# Altium PCB GBxProg.PcbDoc
Units mil, origin at the board's own origin, x right, y up, seen from the top; angles counter-clockwise.
Board outline 1861 x 1950 mil, 2 copper layers (Top, Bottom), stack 65.748 mil thick; 34 components, 74 nets, 230 pads, 115 vias.
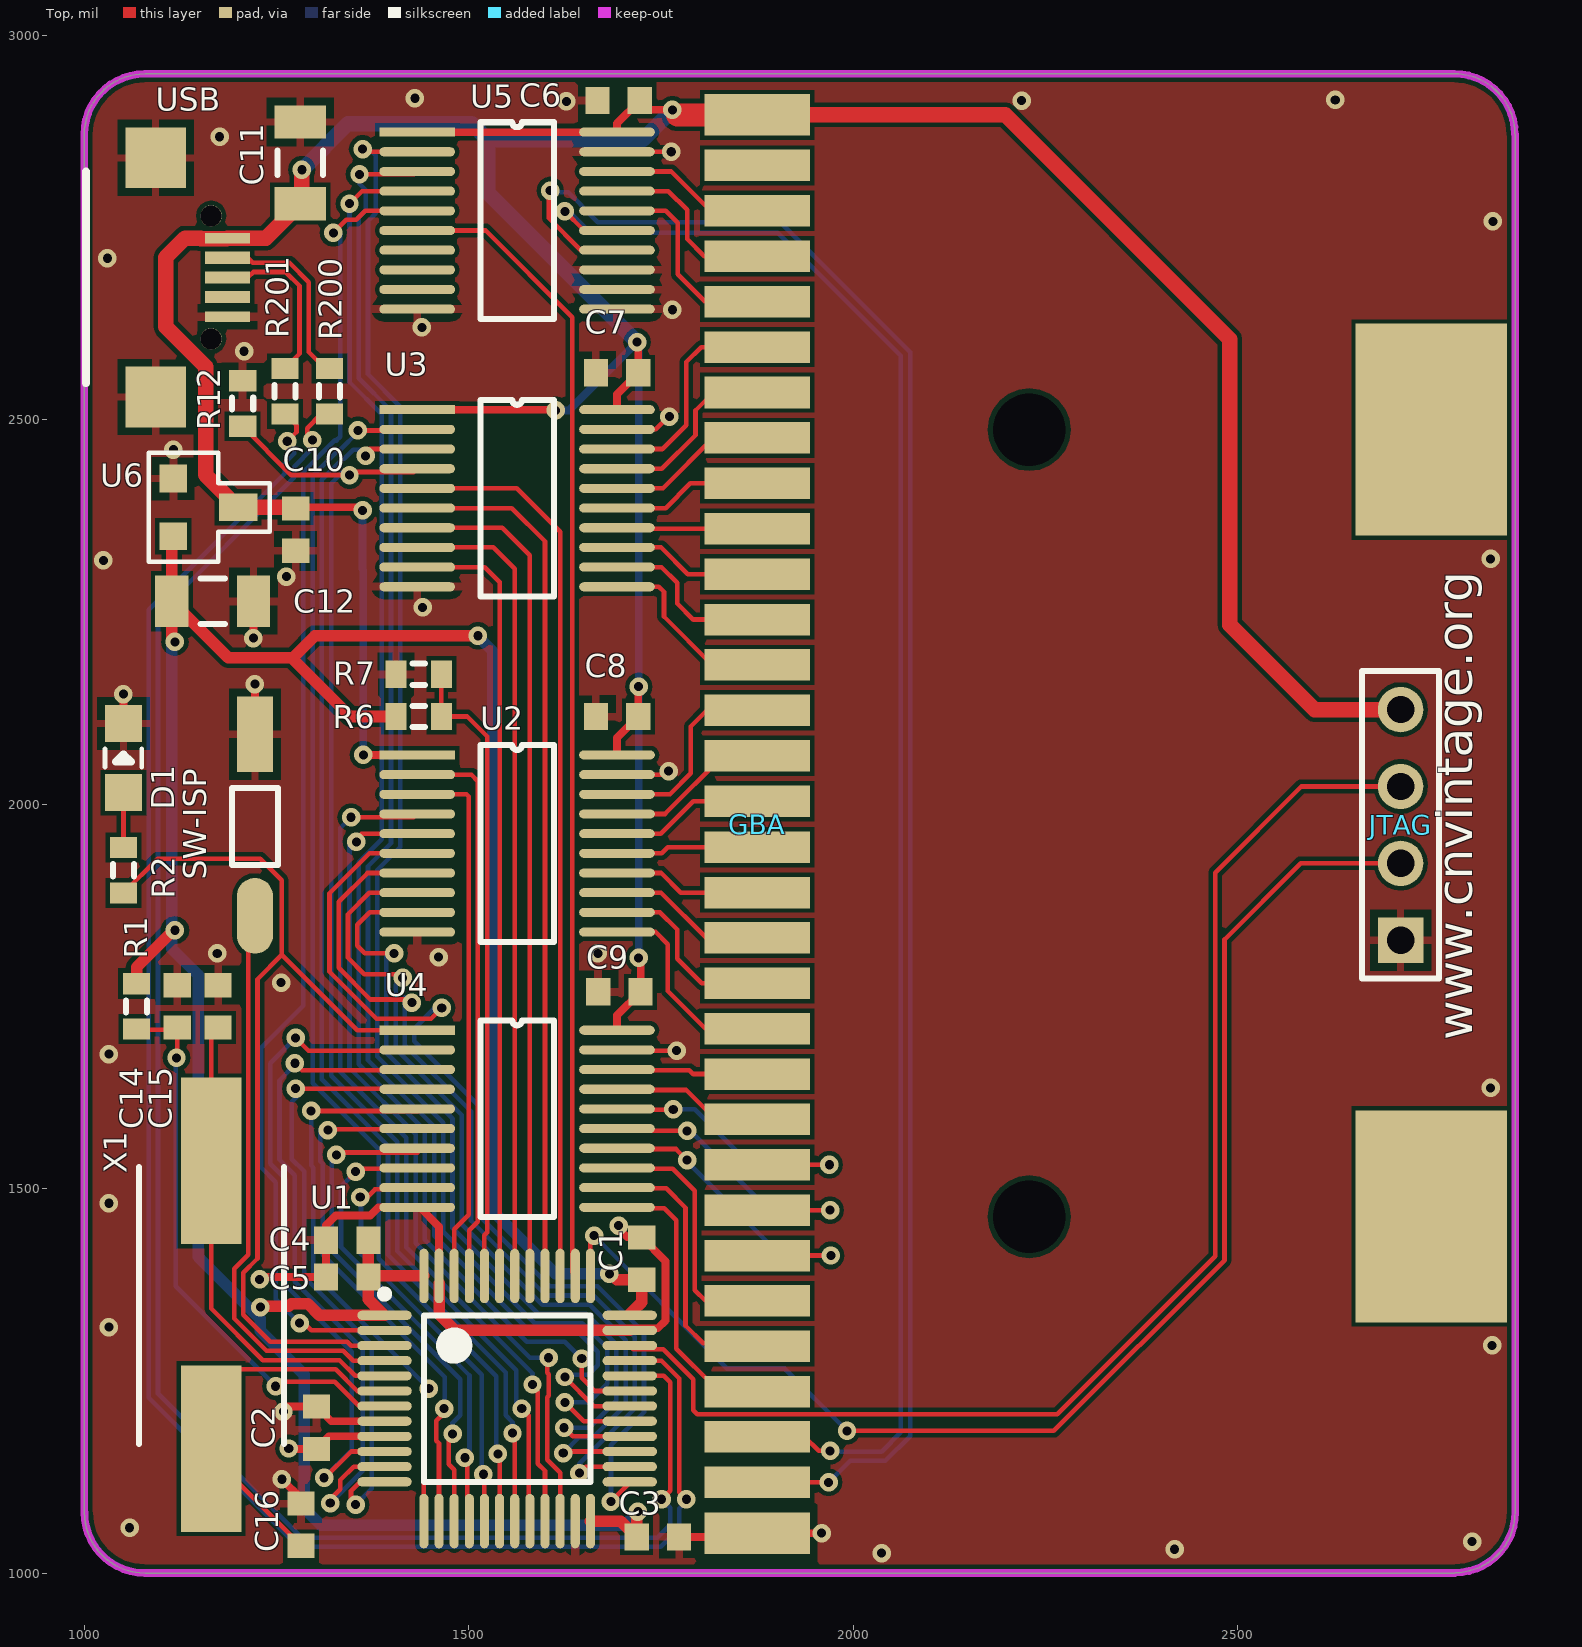
[diagram p0: Top view]
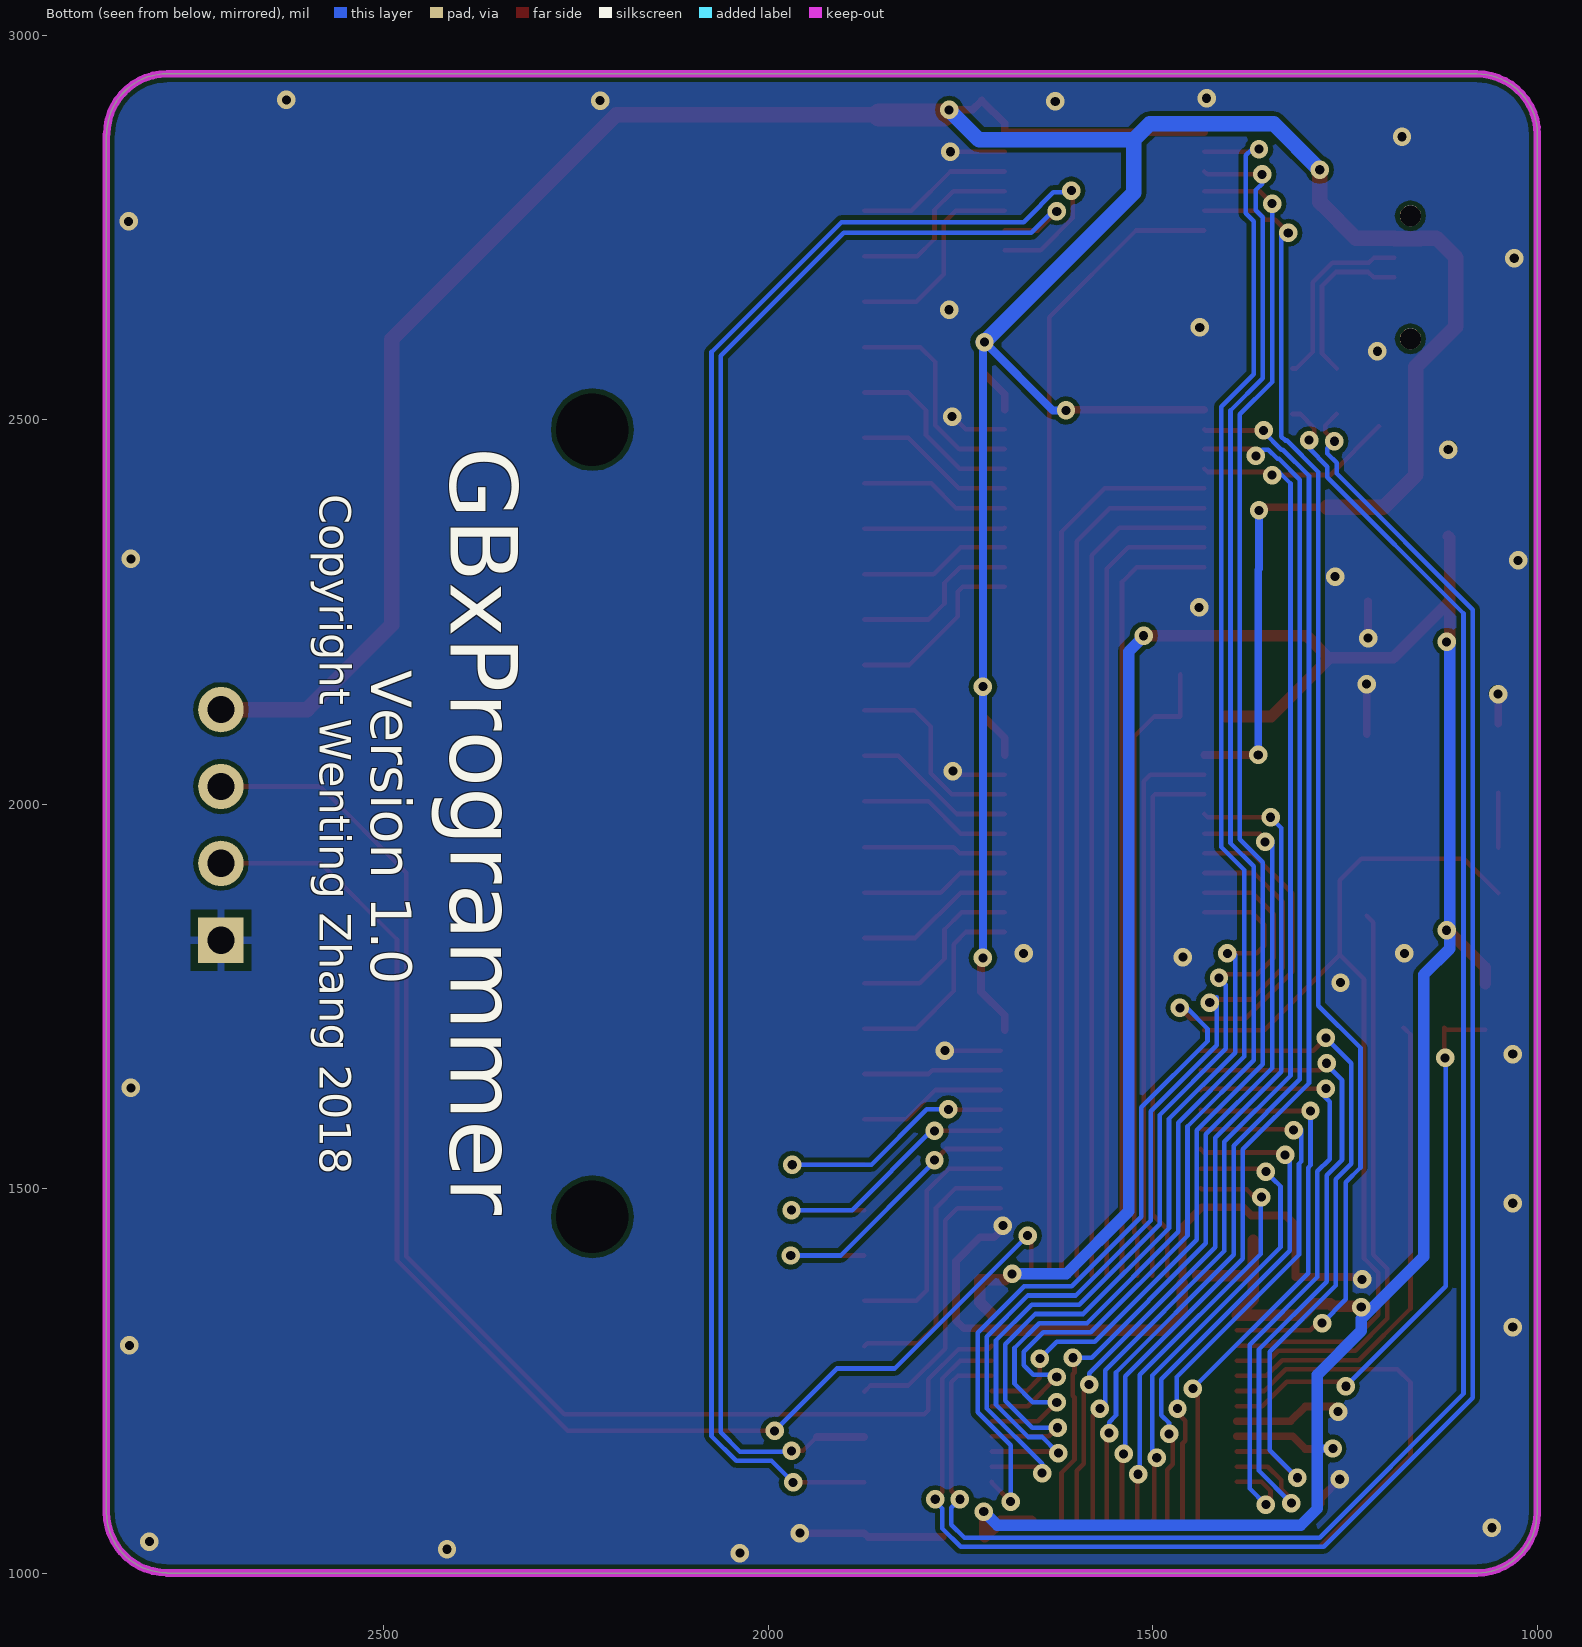
[diagram p1: Bottom view, seen from below]

## Layer stack, top to bottom
Top Solder: solder mask 0.4, Solder Resist, Dk 3.5
Top: signal copper 1.378
Dielectric 1: core 62.9921, FR-4, Dk 4.8
Bottom: signal copper 1.378
Bottom Solder: solder mask 0.4, Solder Resist, Dk 3.5

## Board outline
1000.26,1078.74 ccw(c1079,1078.74) 1079,1000 2782.25,1000 2782.25,1000.47 ccw(c2782.25,1079.21) 2860.99,1079.21 2861,1079.22 2861,2871.25 2860.53,2871.25 ccw(c2781.79,2871.25) 2781.79,2949.99 2781.78,2950 1079,2950 1078.74,2949.74 ccw(c1078.74,2871) 1000,2871

## Design rules (kind name [scope] priority, off if disabled: settings)
Clearance mdViaVia [IsVia vs IsVia] p1: gap=8
Clearance mdPadVia [IsPad vs IsVia] p2: gap=6
Clearance mdPadPad [IsPad vs IsPad] p3: gap=6
Clearance mdWireVia [(InLayerClass('Signal Layers') AND IsTrack) vs IsVia] p4: gap=6
Clearance mdWirePad [(InLayerClass('Signal Layers') AND IsTrack) vs IsPad] p5: gap=6
Clearance mdWireWire [(InLayerClass('Signal Layers') AND IsTrack) vs (InLayerClass('Signal Layers') AND IsTrack)] p6: gap=6
Clearance [All] p7: gap=6
ComponentClearance [All] p1: gap=0 collisioncheckmode=3 verticalgap=0 showdistances=FALSE
HoleSize [All] p1: absolutevalues=TRUE maxlimit=100000 minlimit=11.81 maxpercent=80.000 minpercent=20.000
HoleToHoleClearance [All] p1: gap=8 allowstackedmicrovias=TRUE
PolygonConnect ThermalVias [IsVia] p1: connectstyle=Direct reliefconductorwidth=10 reliefentries=4 polygonreliefangle="90 Angle" airgapwidth=10
PolygonConnect [All] p2: connectstyle=Relief reliefconductorwidth=10 reliefentries=4 polygonreliefangle="90 Angle" airgapwidth=10
RoutingVias [All] p1: holewidth=11.81 width=24.02 viastyle="Through Hole" minholewidth=11.81 minwidth=24.02 maxholewidth=11.81 maxwidth=24.02
SilkToSilkClearance [All] p1 off: silktosilkclearance=10
SilkToSolderMaskClearance [IsPad] p1 off: minsilkscreentomaskgap=10 clearancetoexposedcopper=TRUE
SolderMaskExpansion [All] p1: expansion=0
Width [All] p1: maxlimit=100000 minlimit=6 preferedwidth=10
25 further rules are at their usual default settings.

## Components (designator, comment, footprint, x,y, rotation, side; value= is the part's Value field where it differs from the comment)
C1 "104" 1608[0603] 1725,1409 r270 top
C2 "104" 1608[0603] 1302,1189 r270 top
C3 "104" 1608[0603] 1746,1047 r180 top
C4 "104" 1608[0603] 1342,1433 r0 top
C5 "104" 1608[0603] 1342,1385 r0 top
C6 "104" 1608[0603] 1695,2915 r0 top
C7 "104" 1608[0603] 1693,2561 r0 top
C8 "104" 1608[0603] 1693,2114 r0 top
C9 "104" 1608[0603] 1696,1756 r0 top
C10 "104" 1608[0603] 1275,2357 r90 top
C11 "50uF" C1206 1281,2834 r270 top
C12 "50uF" C1206 1167,2264 r180 top
C14 "104" 1608[0603] 1121,1737 r270 top
C15 "22pF" 1608[0603] 1174,1737 r90 top
C16 "22pF" 1608[0603] 1282,1063 r90 top
D1 "LED" 0805D 1051,2060 r90 top
GBA "GBCart" GB_CART_1 1880,1995 r270 top
JTAG "Header 4" HDR1X4 2712,1823 r90 top
R1 "10K" J1-0603 1068,1737 r90 top
R2 "4K7" J1-0603 1051,1914 r90 top
R6 "NC" J1-0603 1435,2114 r180 top
R7 "10K" J1-0603 1435,2169 r0 top
R12 "10K" J1-0603 1206,2521 r90 top
R200 "22R" J1-0603 1319,2537 r90 top
R201 "22R" J1-0603 1261,2537 r90 top
SW-ISP "SW-PB" SOP2 1222,2091 r270 top
U1 "STM32F103C8T6" LQFP48_N 1550,1227 r0 top
U2 "74HC245" TSSOP20 1433,2064 r0 top
U3 "74HC245" TSSOP20 1433,2513 r0 top
U4 "74HC245" TSSOP20 1433,1706 r0 top
U5 "74HC245" TSSOP20 1433,2874 r0 top
U6 "6209" SOT-23 1158,2386 r270 top
USB "USB-MINIAB" USB-MICRO 1081,2685 r270 top
X1 "8M" 49S 1165,1162 r90 top

## Footprints (in the part's own frame and the unit in brackets; to place one, negate y for a bottom-side part, rotate by r counter-clockwise, add the part's x,y. Pads: shape width x height; smd on the part's side, far side on the other; paste and mask are expansions set on the pad)
49S [mm]
  rect 5.5x2 smd: 1(0,0) 2(9.5,0)
  silkscreen extent 0.15,-2.41 9.3,2.39
0805D [mil] "0805"
  rect 48x48 smd: A(-45,0) K(45,0)
  silkscreen extent -12,-24 12,24
1608[0603] [mm] "Chip Capacitor, Body 1.6x0.8mm, IPC High Density"
  rect 0.8x0.9 smd: 1(-0.7,0) 2(0.7,0)
  body extent -0.87,-0.48 0.87,0.48, height 1.3
C1206 [mm] "Chip Capacitor, Body 3.2x1.6mm, IPC High Density"
  rect 1.1x1.7 smd: 1(-1.35,0) 2(1.35,0)
  silkscreen extent -0.4,-0.75 0.4,0.75, body extent -1.7,-0.9 1.7,0.9, height 1.3
GB_CART_1 [mil] "GB_CART_1"
  rect 54x137 smd: 1(-901.38,-4.72) 32(943,-4.72)
  rect 41x137 smd: 2(-835.63,-4.72) 3(-776.57,-4.72) 4(-717.52,-4.72) 5(-658.46,-4.72) 6(-599.41,-4.72) 7(-540.35,-4.72) 8(-481.3,-4.72) 9(-422.24,-4.72) 10(-363.19,-4.72) 11(-304.13,-4.72) 12(-245.08,-4.72) 13(-186.02,-4.72) 14(-126.97,-4.72) 15(-67.91,-4.72) 16(-8.86,-4.72) 17(51,-4.72) 18(110,-4.72) 19(169,-4.72) 20(228,-4.72) 21(287,-4.72) 22(346,-4.72) 23(405,-4.72) 24(464,-4.72) 25(523,-4.72) 26(582,-4.72) 27(641,-4.72) 28(700,-4.72) 29(759,-4.72) 30(818,-4.72) 31(877,-4.72)
HDR1X4 [mm] "Connector; Header; 4 Position"
  rect 1.5x1.5 hole 0.9: 1(0,0)
  round 1.5 hole 0.9: 2(2.54,0) 3(5.08,0) 4(7.62,0)
  silkscreen extent -1.27,-1.27 8.89,1.27
J1-0603 [mm] "Chip Resistor, Body 1.6x0.8mm, IPC High Density"
  rect 0.7x0.9 smd: 1(-0.75,0) 2(0.75,0)
  silkscreen extent -0.2,-0.35 0.2,0.35, body extent -0.85,-0.48 0.85,0.48, height 0.9
LQFP48_N [mm]
  oval 1.8x0.3 smd: 1(-4.05,2.75) 2(-4.05,2.25) 3(-4.05,1.75) 4(-4.05,1.25) 5(-4.05,0.75) 6(-4.05,0.25) 7(-4.05,-0.25) 8(-4.05,-0.75) 9(-4.05,-1.25) 10(-4.05,-1.75) 11(-4.05,-2.25) 12(-4.05,-2.75) 25(4.05,-2.75) 26(4.05,-2.25) 27(4.05,-1.75) 28(4.05,-1.25) 29(4.05,-0.75) 30(4.05,-0.25) 31(4.05,0.25) 32(4.05,0.75) 33(4.05,1.25) 34(4.05,1.75) 35(4.05,2.25) 36(4.05,2.75)
  oval 0.3x1.8 smd: 13(-2.75,-4.05) 14(-2.25,-4.05) 15(-1.75,-4.05) 16(-1.25,-4.05) 17(-0.75,-4.05) 18(-0.25,-4.05) 19(0.25,-4.05) 20(0.75,-4.05) 21(1.25,-4.05) 22(1.75,-4.05) 23(2.25,-4.05) 24(2.75,-4.05) 37(2.75,4.05) 38(2.25,4.05) 39(1.75,4.05) 40(1.25,4.05) 41(0.75,4.05) 42(0.25,4.05) 43(-0.25,4.05) 44(-0.75,4.05) 45(-1.25,4.05) 46(-1.75,4.05) 47(-2.25,4.05) 48(-2.75,4.05)
  silkscreen extent -4.17,-2.75 2.75,3.57
SOP2 [mm]
  rect 2.5x1.2 smd: 1(0,0)
  oval 2.5x1.2 smd: 2(6,0)
  silkscreen extent 1.78,-0.76 4.32,0.76
SOT-23 [mil]
  rect 36x36 smd: 1(-37.4,-42.18) 2(37.4,-42.18)
  rect 36x50 smd: 3(0,42.18)
  silkscreen extent -71,-74 71,83, body extent -55,-51 55,45, height 43
TSSOP20 [mm]
  rect 2.5x0.3 smd: 1(0,0)
  oval 2.5x0.3 smd: 2(0,-0.65) 3(0,-1.3) 4(0,-1.95) 5(0,-2.6) 6(0,-3.25) 7(0,-3.9) 8(0,-4.55) 9(0,-5.2) 10(0,-5.85) 11(6.6,-5.85) 12(6.6,-5.2) 13(6.6,-4.55) 14(6.6,-3.9) 15(6.6,-3.25) 16(6.6,-2.6) 17(6.6,-1.95) 18(6.6,-1.3) 19(6.6,-0.65) 20(6.6,0)
  silkscreen extent 2.08,-6.18 4.51,0.33
USB-MICRO [mm]
  rect 0.35x1.5 smd: 1(-1.3,2.675) 5(1.3,2.675)
  rect 0.4x1.5 smd: 2(-0.65,2.675) 3(0,2.675) 4(0.65,2.675)
  round 0.7 hole 0.7 unplated: 6(-2.032,2.134) 7(2.032,2.134)
  rect 2x2 smd: 8(-3.95,0.3) 9(3.95,0.3)
  silkscreen extent -3.5,-2 3.5,-2

## Part data
C1 C2 C3 C4 C5 C6 C7 C8 C9 C10 C11 C12 C14 C15 C16: library part "Cap Semi", "Capacitor (Semiconductor SIM Model)"
JTAG: "Header, 4-Pin"
R1 R2 R6 R7 R12 R200 R201: library part Res3, "Resistor"
SW-ISP: "Switch"
U1: "STM32 ARM-based 32-bit MCU with 64 Kbytes Flash, 48-pin LQFP, Industrial Temperature"
X1: library part CRYSTAL

## Free pads (board coordinates)
  round 0 hole 94.49: 1(2229,2487) 2(2229,1463.38)
  rect 196.85x275.59 / inner rect 0x0 / far side rect 0x0 all layers, no hole: 3(2752,2487) 4(2752,1464)

## Via types
v1: diameter 24.02, hole 11.81, Top to Bottom, 115 vias

## Nets (pads, with @x,y where several pads share a name; then routed paths per layer and width w, separated by ;. In a path a pad name is that pad's centre, name@x,y a point inside that pad or via, vN(x,y) a via of type N, cw(c..) or ccw(c..) an arc to the next point about the centre after c; other vN are vias at no path point)
3V3: C1.2 C2.2 C3.2 C4.2 C5.2 C12.2 R1.2 R6.2 U1.1 U1.9 U1.24 U1.36 U1.48 U6.2 | length 4117.4
  Top w10: v1(1266,1162) 1266.56,1161.44 C2.2 1318.35,1177.79 U1.9
  Top w15: R1.2 1068,1788 1117,1837 v1(1118,1836) ; v1@1113.85,2211.35 C12.2 ; U6.2 1113.85,2346.63 C12.2 ; v1(1229,1346) 1230,1347 1265.93,1347 1269.43,1350.51 1290.57,1350.51 1305.81,1335.27 U1.1 1369.56,1356.26 C5.2 ; 1270.5,2189.5 1346,2114 R6.2 ; C4.2 C5.2 ; U1.48 1371.01,1386.45 C5.2 ; v1(1512,2219) 1300,2219 1271.49,2190.49 1187.36,2190.49 C12.2 ; U1.24 1658.27,1067.49 1695.57,1067.49 1695.62,1067.55 1697.89,1067.55 C3.2 1718.44,1078.44 v1(1720,1080) ; 1692.56,1381.44 C1.2 1725,1352.41 U1.36@1709.45,1336.86
  Bottom w10: v1(1266,1162) 1285,1162 1286,1163
  Bottom w15: v1@1114,1835 1114,1812 1148,1778 1148,1411.5 1229,1330.5 1229,1315 1286,1258 1286,1163 1286,1084 1307.5,1062.5 1702.5,1062.5 v1(1720,1080) ; v1@1114,1836 1114,2210 1115,2211 v1(1118,2211) ; v1@1118,1835 v1(1118,1836) ; v1(1512,2219) 1512,2218 1531.51,2198.49 1531.51,1470.38 1612.38,1389.51 1682.49,1389.51 v1(1683,1389)
5V: C6.2 C7.2 C8.2 C9.2 C10.2 C11.2 GBA.1 JTAG.4 U2.1 U2.20 U3.1 U3.20 U4.20 U5.1 U5.20 U6.3 USB.1 | length 5324.2
  Top w10: C10.2@1273.56,2386 1358,2386 v1(1362,2382) ; v1(1363,2064) U2.1 ; U3.1 1612,2513 v1(1613,2512) ; U5.1 U5.20 1692.84,2885.28 C6.2 1734.56,2903 v1(1765,2903) v1@1771.62,2896.38 ; U4.20 1692.84,1725.28 C9.2 1723.56,1797.44 v1(1721,1800) ; U2.20 1692.84,2086.28 C8.2 1720.56,2152.44 v1(1721,2152.88) ; U3.20 1692.84,2533.28 C7.2 1720.56,2599.44 v1(1719,2601)
  Top w20: C10.2@1273.56,2386 U6.3 1158,2428.18 1158,2569 1106,2621 1106,2711 1131.18,2736.18 1151.7,2736.18 1151.7,2735.22 1185.35,2735.22 USB.1 1236.33,2736.18 C11.2 1283,2782.85 v1(1283,2825) ; GBA.1@1856,2896.38 GBA.1 2198.01,2896.38 2490,2604.39 2490,2233 2600,2123 JTAG.4
  Top w30: v1@1771.62,2896.38 GBA.1@1856,2896.38
  Bottom w10: v1(1362,2382) 1362,2306 1363,2305 v1(1363,2064) ; v1(1613,2512) 1630,2512 v1(1719,2601) ; v1(1721,1800) v1(1721,2152.88) 1721,2596 v1@1726,2601
  Bottom w20: v1(1283,2825) 1343,2885 1504,2885 1525,2864 ; v1(1719,2601) 1525,2795 1525,2864 ; v1(1765,2903) 1726,2864 1525,2864
AIN: GBA.31 U5.14 | length 2331.7
  Top w6: v1(1606,2798) 1603.99,2795.99 1603.99,2762.3 1645.83,2720.46 U5.14 ; GBA.31 v1(1968,1118)
  Bottom w6: v1(1606,2798) 1608,2796 1629.71,2796 1646.01,2779.7 1646.01,2778.99 1668,2757 1904.97,2757 2074,2587.97 2074,1178.03 2041.97,1146 1996,1146 v1(1968,1118)
BOOT0: R6.1 R7.2 U1.44 | length 828.3
  Top w6: R7.2 R6.1 1498,2114 1524,2088 1524,1443 1520.47,1439.47 U1.44
BOOT1: R12.1 U1.20 U3.4 | length 1745.7
  Top w6: R12.1 1269.47,2428 v1(1345,2428) 1345,2429 1347.99,2431.99 1428.76,2431.99 U3.4 ; v1(1568.98,1213.98) 1577.99,1204.98 1577.99,1069.09 U1.20
  Bottom w6: v1(1345,2428) 1341,2432 1335.94,2432 1321,2417.06 1321,1646.94 1407.01,1560.93 1407.01,1418.82 1561.98,1263.85 1561.98,1220.99 v1(1568.98,1213.98)
CS: GBA.5 U5.16 | length 270.6
  Top w6: U5.16 1756.36,2771.64 1772,2756 1772,2689 1807.54,2653.46 GBA.5
GB_A0: U1.18 U3.2 | length 1629.3
  Top w6: v1(1356,2486) 1431.59,2486 U3.2 ; v1(1538,1155) v1@1538.16,1155.16 ; v1@1540,1157 v1@1538.16,1155.16 ; U1.18 1540.16,1155.16 v1@1538.16,1155.16
  Bottom w6: v1(1356,2486) 1356,2484.03 1332.98,2461.01 1331.01,2461.01 1297,2427 1297,1637 1383.01,1550.99 1383.01,1408.87 1535.98,1255.91 1535.98,1157.02 v1(1538,1155) v1@1540,1157
GB_A1: U1.19 U3.3 | length 1623.4
  Top w6: v1(1366,2453) 1366,2457 1370.82,2461.82 U3.3 ; v1(1556.98,1181.97) 1559.84,1184.84 U1.19
  Bottom w6: v1(1366,2453) 1358,2461 1349.94,2461 1337.95,2449.01 1335.98,2449.01 1309,2422.03 1309,1641.97 1395.01,1555.96 1395.01,1413.84 1547.98,1260.88 1547.98,1205.28 1556.98,1196.27 v1(1556.98,1181.97) 1559,1183.98 v1@1559,1191
GB_A3: U1.39 U3.5 | length 1177
  Top w6: U3.5 1562.36,2410.64 1618.9,2354.1 U1.39
GB_A4: U1.40 U3.6 | length 1139.5
  Top w6: U3.6 1555.95,2385.05 1599.21,2341.79 U1.40
GB_A5: U1.41 U3.7 | length 1098.5
  Top w6: U3.7 1543.54,2359.46 1579.53,2323.47 U1.41
GB_A6: U1.42 U3.8 | length 1058
  Top w6: U3.8 1532.13,2333.87 1559.84,2306.16 U1.42
GB_A7: U1.43 U3.9 | length 1017.6
  Top w6: U3.9 1520.72,2308.28 1540.16,2288.84 U1.43
GB_A8: U1.45 U2.2 | length 730.7
  Top w6: U2.2 1503.59,2038.41 1512,2030 1512,1457 1500.79,1445.79 U1.45
GB_A9: U1.46 U2.3 | length 699.5
  Top w6: U2.3 1497.18,2012.82 1500,2010 1500,1466 1481.1,1447.1 U1.46
GB_A10: U1.21 U2.4 | length 1132.1
  Top w6: v1(1347,1983) 1428.77,1983 U2.4 ; v1(1582.98,1245.26) 1582.98,1243.02 1589.99,1236.01 1589.99,1142.33 1599.21,1133.11 U1.21
  Bottom w6: v1(1347,1983) 1333,1969 1333,1651.91 1419.01,1565.9 1419.01,1423.79 1582.98,1259.81 v1(1582.98,1245.26) 1585.26,1245.26 1589,1249 1586,1252 v1@1586,1253
GB_A11: U1.22 U2.5 | length 1123.2
  Top w6: v1(1354.01,1950.98) 1352,1952.99 1360.65,1961.64 U2.5 ; v1(1604,1280) 1601.99,1277.99 1601.99,1260.72 1603.99,1258.72 1603.99,1246.3 1603.99,1230.7 1601.99,1228.7 1601.99,1147.3 1618.9,1130.39 U1.22
  Bottom w6: v1(1354.01,1950.98) 1351.99,1953 1345,1953 1345,1656.88 1431.01,1570.87 1431.01,1428.76 1579.76,1280 v1(1604,1280) 1604,1279 v1@1598,1273
GB_A12: U1.25 U2.6 | length 1290.7
  Top w6: U2.6 1371.05,1936.05 1319,1884 1319,1782.03 1380.07,1720.96 1450.96,1720.96 v1(1465,1735) ; v1(1685,1093) 1709.45,1117.45 U1.25
  Bottom w6: v1(1465,1735) 1456,1735 1429,1708 1429,1691.68 1515.01,1605.67 1515.01,1463.55 1605.55,1373.01 1667.55,1373.01 1728.01,1312.55 1728.01,1209.1 1685,1166.09 v1(1685,1093)
GB_A13: U1.26 U2.7 | length 1209.4
  Top w6: v1(1426.01,1741.97) 1426.01,1745.99 1372.01,1745.99 1331,1787 1331,1873 1368.46,1910.46 U2.7 ; v1(1644,1130) 1652.42,1138.42 U1.26
  Bottom w6: v1(1426.01,1741.97) 1424.03,1741.97 1417,1749 1417,1686.7 1503.01,1600.7 1503.01,1458.58 1600.58,1361.01 1662.58,1361.01 1716.01,1307.58 1716.01,1214.07 1644,1142.06 v1(1644,1130)
GB_A14: U1.27 U2.8 | length 1153.6
  Top w6: v1(1414.01,1773.98) 1409,1778.99 1364.01,1778.99 1343,1800 1343,1857 1370.87,1884.87 U2.8 ; v1(1623,1156) 1625.1,1158.1 U1.27
  Bottom w6: v1(1414.01,1773.98) 1405,1764.98 1405,1681.73 1491.01,1595.73 1491.01,1453.61 1595.61,1349.01 1657.61,1349.01 1704.01,1302.61 1704.01,1219.04 1661.97,1177 1644,1177 v1(1623,1156)
GB_A15: U1.28 U2.9 | length 1087.5
  Top w6: v1(1403,1806) 1365,1806 1355,1816 1355,1843 1371.28,1859.28 U2.9 ; v1(1624,1189) 1635.21,1177.79 U1.28
  Bottom w6: v1(1403,1806) 1395,1806 1393,1804 1393,1676.76 1479.01,1590.76 1479.01,1448.64 1590.64,1337.01 1652.64,1337.01 1692.01,1297.64 1692.01,1224.01 1657,1189 v1(1624,1189)
GB_AIN: U1.38 U5.6 | length 1496.9
  Top w6: U5.6 1521.95,2746.05 1634.63,2633.37 1634.63,1390.4 U1.38
GB_CS: U1.31 U5.4 | length 1870.1
  Top w6: v1(1345,2781) 1361.23,2797.23 U5.4 ; v1(1647,1279) 1647,1254 1664.16,1236.84 U1.31
  Bottom w6: v1(1345,2781) 1345,2549 1387.01,2506.99 1387.01,1954.27 1357,1924.27 1357,1661.85 1443.01,1575.84 1443.01,1433.73 1575.73,1301.01 1624.99,1301.01 v1(1647,1279)
GB_D0: U1.10 U4.2 | length 907.1
  Top w6: v1(1275,1696.02) 1291.61,1679.41 U4.2@1438,1679.41 ; v1(1312,1124) 1313,1124 1347.1,1158.1 U1.10
  Bottom w6: v1(1275,1696.02) 1241.99,1663.01 1241.99,1532.41 1262,1512.4 1262,1374.03 1348,1288.03 1348,1160 v1(1312,1124)
GB_D1: U1.11 U4.3 | length 915.4
  Top w6: v1(1274,1663) 1283.18,1653.82 U4.3@1438,1653.82 ; v1(1320,1091) 1320,1096 1333.01,1109.01 1333.01,1121.01 1350.42,1138.42 U1.11
  Bottom w6: v1(1274,1663) 1274,1661 1253.99,1640.99 1253.99,1537.38 1274,1517.37 1274,1379 1362,1291 1362,1133 v1(1320,1091) v1@1320,1096
GB_D2: U1.12 U4.4 | length 829.1
  Top w6: v1(1275,1630) 1436.23,1630 U4.4@1438,1628.23 ; v1(1353,1089) 1347,1095 1347,1107 1358.73,1118.73 U1.12
  Bottom w6: v1(1275,1630) 1275,1622 1277,1620 1270,1613 1270,1538.34 1286,1522.34 1286,1385.03 1374,1297.03 1374,1110 v1(1353,1089)
GB_D3: U1.13 U4.5 | length 744.8
  Top w6: v1(1295,1601) 1436.36,1601 U4.5@1438,1602.64 ; U1.13 1441.73,1233.73 v1(1448,1240)
  Bottom w6: v1(1295,1601) 1293,1599 1295,1597 1295,1557.66 1295,1530.31 1298,1527.31 1298,1390 v1(1448,1240)
GB_D4: U1.14 U4.6 | length 726
  Top w6: v1(1317,1576) 1317,1572 1322.05,1577.05 U4.6@1438,1577.05 ; U1.14 1461.42,1168.87 1457.99,1172.3 1457.99,1197.99 1468,1208 v1(1468,1214)
  Bottom w6: v1(1317,1576) 1316,1577 1307,1577 1307,1552.69 1307,1535.28 1310,1532.28 1310,1414 1469.01,1254.99 1469.01,1215.01 v1(1468,1214) v1@1468,1208
GB_D5: U1.15 U4.7 | length 688.4
  Top w6: v1(1328.01,1543.98) 1325,1546.99 1433.54,1546.99 U4.7@1438,1551.46 ; v1(1479,1181) 1473.99,1175.99 1473.99,1141.3 1481.1,1134.19 U1.15
  Bottom w6: v1(1328.01,1543.98) 1323.99,1548 1322,1548 1322,1418.97 1489.01,1251.96 1489.01,1205.3 1479,1195.29 v1(1479,1181) v1@1481,1179
GB_D6: U1.16 U4.8 | length 637.8
  Top w6: v1(1353,1522) 1346,1515 1353,1515 1363.87,1525.87 U4.8@1438,1525.87 ; v1(1495,1150) 1495,1150.72 1498.14,1153.86 1498.14,1070.2 U1.16
  Bottom w6: 1344,1513 1334,1503 1334,1423.94 1501.01,1256.93 1501.01,1156.01 v1(1495,1150)
GB_D7: U1.17 U4.9 | length 572.7
  Top w6: v1(1359,1489) 1368,1489 1377,1498 1378,1499 1436.72,1499 U4.9@1438,1500.28 ; v1(1519.15,1128.57) 1519.37,1128.57 1520.47,1127.47 U1.17
  Bottom w6: v1(1359,1489) 1359.96,1488.04 1359.96,1414.96 1516.99,1257.92 1516.99,1130.73 v1(1519.15,1128.57) v1@1519.58,1129
GB_DIR: R2.1 U1.3 U4.1 | length 1238.5
  Top w6: R2.1 1095.53,1929 1229,1929 1257,1901 1257,1804 ; U1.3 1347.01,1295.9 1341.91,1301 1242,1301 1206.99,1336.01 1206.99,1390.7 1225.37,1409.08 1225.37,1772.37 1257,1804 ; U4.1 1355,1706 1257,1804
GB_RD: U1.30 U5.3 | length 1971.8
  Top w6: v1(1358,2819) 1429.18,2819 U5.3 ; v1(1625,1255) 1662.84,1217.16 U1.30
  Bottom w6: v1(1358,2819) 1358,2806.72 1366.01,2798.71 1366.01,2772.3 1357,2763.29 1357,2553.97 1399.01,2511.96 1399.01,1949.3 1369,1919.3 1369,1666.82 1455.01,1580.82 1455.01,1438.7 1580.7,1313.01 1642.7,1313.01 1668.01,1287.7 1668.01,1270.3 1655.7,1257.99 1627.99,1257.99 v1(1625,1255)
GB_RES: U1.2 U5.5 | length 1726.3
  Top w6: v1(1280,1325) 1286,1325 1295.42,1315.58 U1.2 ; v1(1323.99,2743) 1340.98,2759.99 1353.7,2759.99 1365.35,2771.64 U5.5
  Bottom w6: v1(1280,1325) 1249.01,1355.99 1249.01,1508.42 1229.99,1527.44 1229.99,1682.99 1285,1738 1285,2431.97 1326.04,2473.01 1328.01,2473.01 1333,2478 1333,2742 1332,2743 v1(1323.99,2743)
GB_WR: U1.29 U5.2 | length 2044.5
  Top w6: v1(1362,2852) 1365.59,2848.41 U5.2 ; v1(1625,1222) 1649.53,1197.47 U1.29
  Bottom w6: v1(1362,2852) 1371,2852 1379.01,2843.99 1379.01,2768.33 1369,2758.32 1369,2558.94 1411.01,2516.93 1411.01,1944.33 1381,1914.33 1381,1671.79 1467.01,1585.79 1467.01,1443.67 1585.67,1325.01 1647.67,1325.01 1680.01,1292.67 1680.01,1246.01 1656,1222 v1(1625,1222)
GND: C1.1 C2.1 C3.1 C4.1 C5.1 C6.1 C7.1 C8.1 C9.1 C10.1 C11.1 C12.1 C14.1 C15.2 C16.2 D1.K GBA.32 JTAG.1 R7.1 R12.2 SW-ISP.1 U1.8 U1.23 U1.35 U1.47 U2.10 U2.19 U3.10 U3.19 U4.10 U4.19 U5.10 U5.11 U5.12 U5.13 U5.19 U6.1 USB.5 USB.8 USB.9 | length 1709.9
  Top w6: U2.19 1755.41,2038.41 v1(1760,2043) ; U3.19 1743.41,2487.41 1760,2504 v1(1761,2504) ; U5.19 v1(1763.41,2848.41) ; U4.19@1697.84,1679.41 v1(1770.41,1679.41)
  Top w10: D1.K v1(1051,2143) ; v1(1220,2216) 1220.15,2216.15 C12.1 ; SW-ISP.1 v1(1222,2156) ; v1(1228,1382) 1231,1385 C5.1 C4.1 1314.44,1452.44 1327,1465 1372,1465 1382.68,1475.68 U4.10 1436.32,1475.68 1461.42,1450.58 U1.47 ; v1(1257,1122) 1282,1097 C16.2 ; v1(1259,1210) 1259,1213 1262.56,1216.56 C2.1 1321.09,1197.47 U1.8 ; v1(1695.02,1451.77) 1695.02,1447.98 1706.44,1436.56 C1.1 1756,1405.56 1756,1328.38 1745.98,1318.36 1712.23,1318.36 U1.35 ; C3.1 1870.28,1047 GBA.32 v1(1959,1052)
  Top w15: U1.47@1461.7,1376.71 1461.7,1336.3 1482.42,1315.58 U1.35
  Bottom w10: v1(1051,2143) v1@1052,2144 ; v1@1115,2462 v1(1115.82,2461.18) ; v1@1258,1211 v1(1259,1210)
  other v1: 2037,1026 2418,1031 2805,1041 1059,1059 2831,1296 1032,1320 1032,1481 2829,1631 1032,1675 1256,1768 1461,1801 1173,1806 1668,1806 1440,2256 1263,2296 1025,2317 2829,2319 1208,2589 1439,2620 1765,2643 1030,2710 2832,2758 1176,2868 1627,2914 2219,2915 2627,2916 1430,2918
ISP_KEY: SW-ISP.2 U1.4 | length 753.2
  Top w6: SW-ISP.2 1213.37,1846.15 1213.37,1414.05 1194.99,1395.67 1194.99,1331.04 1237.03,1289 1336.94,1289 1349.73,1276.21 U1.4
NetD1_A: D1.A R2.2 | length 71.5
  Top w6: R2.2 D1.A
NetGBA_6: GBA.6 U3.18 | length 285.4
  Top w6: U3.18 1751.82,2461.82 1783,2493 1783,2575 1802.41,2594.41 GBA.6
NetGBA_7: GBA.7 U3.17 | length 242.2
  Top w6: U3.17 1751.23,2436.23 1795,2480 1795,2512 1818.35,2535.35 GBA.7
NetGBA_8: GBA.8 U3.16 | length 209.6
  Top w6: U3.16 1752.64,2410.64 1818.3,2476.3 GBA.8
NetGBA_9: GBA.9 U3.15 | length 195.8
  Top w6: U3.15 1756.05,2385.05 1788.24,2417.24 GBA.9
NetGBA_10: GBA.10 U3.14 | length 183
  Top w6: U3.14 1694.11,2358.19 GBA.10
NetGBA_11: GBA.11 U3.13 | length 196.8
  Top w6: U3.13 1750.13,2333.87 1784.87,2299.13 GBA.11
NetGBA_12: GBA.12 U3.12 | length 226.5
  Top w6: U3.12 1750.72,2308.28 1771,2288 1771,2261 1791.92,2240.08 GBA.12
NetGBA_13: GBA.13 U3.11 | length 243.3
  Top w6: U3.11 1747.32,2282.68 1754,2276 1754,2244 1816.98,2181.02 GBA.13
NetGBA_14: GBA.14 U2.18 | length 263.4
  Top w6: U2.18 1761.82,2012.82 1789,2040 1789,2101 1809.97,2121.97 GBA.14
NetGBA_15: GBA.15 U2.17 | length 213.8
  Top w6: U2.17 1755.23,1987.23 1830.91,2062.91 GBA.15
NetGBA_16: GBA.16 U2.16 | length 199.9
  Top w6: U2.16 1749.64,1961.64 1791.86,2003.86 GBA.16
NetGBA_17: GBA.17 U2.15 | length 185.7
  Top w6: U2.15 1751.05,1936.05 1759,1944 GBA.17
NetGBA_18: GBA.18 U2.14 | length 193
  Top w6: U2.14 1750.54,1910.46 1776,1885 GBA.18
NetGBA_19: GBA.19 U2.13 | length 206.8
  Top w6: U2.13 1750.13,1884.87 1809,1826 GBA.19
NetGBA_20: GBA.20 U2.12 | length 242.9
  Top w6: U2.12 1748.72,1859.28 1771,1837 1771,1799 1803,1767 GBA.20
NetGBA_21: GBA.21 U2.11 | length 270.2
  Top w6: U2.11 1743.32,1833.68 1759,1818 1759,1757 1808,1708 GBA.21
NetGBA_22: GBA.22 U4.18 | length 179.6
  Top w6: U4.18@1697.84,1653.82 1698.02,1654 1787,1654 1792,1649 GBA.22
NetGBA_23: GBA.23 U4.17 | length 193.3
  Top w6: U4.17@1697.84,1628.23 1782.77,1628.23 1821,1590 GBA.23
NetGBA_24: GBA.24 U4.16 | length 394.9
  Top w6: U4.16@1697.84,1602.64 1765.64,1602.64 v1(1766,1603) ; GBA.24 v1(1969,1531)
  Bottom w6: v1(1766,1603) 1794,1603 1866,1531 v1(1969,1531)
NetGBA_25: GBA.25 U4.15 | length 410.4
  Top w6: U4.15@1697.84,1577.05 1699.87,1575.02 v1(1784.02,1575.02) ; GBA.25 v1(1970,1472)
  Bottom w6: v1(1784.02,1575.02) 1788,1575.02 1891.02,1472 v1(1970,1472)
NetGBA_26: GBA.26 U4.14 | length 428.2
  Top w6: U4.14@1697.84,1551.46 1769.54,1551.46 v1(1784,1537) ; GBA.26 v1(1971,1413)
  Bottom w6: v1(1784,1537) 1783,1536 1906,1413 v1(1971,1413)
NetGBA_27: GBA.27 U4.13 | length 324.2
  Top w6: U4.13@1697.84,1525.87 1765.13,1525.87 1794,1497 1794,1368 1808,1354 GBA.27
NetGBA_28: GBA.28 U4.12 | length 352.1
  Top w6: U4.12@1697.84,1500.28 1756.72,1500.28 1782,1475 1782,1322 1805,1299 1871.28,1299 GBA.28
NetGBA_29: GBA.29 U4.11 | length 374.1
  Top w6: U4.11@1697.84,1474.68 1754.32,1474.68 1770,1459 1770,1292 1818,1244 1867.28,1244 GBA.29
NetR200_2: R200.2 USB.2 | length 245.6
  Top w6: USB.2 1212.41,2710.59 1219,2704 1266.97,2704 1292,2678.97 1292,2588 1313.47,2566.53 R200.2
NetR201_2: R201.2 USB.3 | length 219.4
  Top w6: USB.3 1213,2685 1220,2692 1262,2692 1280,2674 1280,2585.53 R201.2
OSC_IN: C15.1 U1.5 X1.2 | length 630.9
  Top w6: C15.1 1165,1700.44 X1.2 1165,1344.06 1232.06,1277 1331.97,1277 1352.44,1256.53 U1.5
OSC_OUT: C16.1 U1.6 X1.1 | length 505.3
  Top w6: C16.1 1165,1152.44 X1.1 1165,1248 1182,1265 1327,1265 1355.16,1236.84 U1.6
RD: GBA.4 U5.17 | length 239.8
  Top w6: U5.17 1759.77,2797.23 1784,2773 1784,2735 1806.48,2712.52 GBA.4
RES: GBA.30 U5.15 | length 2198
  Top w6: v1(1625,2771) 1649.95,2746.05 U5.15 ; GBA.30@1937,1177 1955,1159 v1(1970,1159)
  Top w10: GBA.30 GBA.30@1937,1177
  Bottom w6: v1(1625,2771) 1630,2771 1658,2743 1902,2743 2062,2583 2062,1183 2037,1158 1971,1158 v1(1970,1159)
RST: C14.2 R1.1 U1.7 | length 732.6
  Top w6: R1.1@1068,1706.47 1118.03,1706.47 C14.2 1121,1671 v1(1120,1670) ; v1(1249,1243) 1255,1249 1326.03,1249 1357.87,1217.16 U1.7
  Bottom w6: v1(1120,1670) 1119,1669 1119,1373 v1(1249,1243)
SWCLK: JTAG.2 U1.37 | length 1758.7
  Top w6: U1.37 1658.27,1434.27 v1(1663,1439) ; v1(1992,1185) 2260.97,1185 2483,1407.03 2483,1824 2582,1923 JTAG.2
  Bottom w6: v1(1663,1439) 1836,1266 1911,1266 v1(1992,1185)
SWDIO: JTAG.3 U1.34 | length 1693.5
  Top w6: U1.34 1714.23,1291.12 1752.85,1291.12 1792,1251.97 1792,1212 1797.5,1206.5 2265.5,1206.5 2471,1412 2471,1911 2583,2023 JTAG.3
USB_DM: R200.1 U1.32 | length 2386.4
  Top w6: v1@1296.72,2466.28 v1(1296.72,2473.4) 1290,2480.13 1290,2489 1308.47,2507.47 R200.1 ; U1.32 1753.5,1256.53 1762,1248.03 1762,1107.02 v1(1750.98,1096)
  Bottom w6: v1(1296.72,2473.4) 1296.72,2462.72 1273,2439 1273,2425 1096,2248 1096,1233 1283,1046 1745,1046 1762,1063 1762,1084.98 v1(1750.98,1096)
USB_DP: R201.1 U1.33 | length 2438
  Top w6: R201.1 1276,2492.47 1276,2484 v1(1264,2472) 1271,2472 v1@1272,2473 ; U1.33 1750.79,1276.21 1774,1253 1774,1105 v1(1783,1096)
  Bottom w6: v1(1264,2472) 1273,2463 1273,2455.97 1261,2443.97 1261,2429.97 1084,2252.97 1084,1228.03 1278.03,1034 1749.97,1034 1774,1058.03 1774,1084 1783,1093 v1(1783,1096)
WR: GBA.3 U5.18 | length 203.7
  Top w6: U5.18 1763.18,2822.82 1814.43,2771.57 GBA.3
pads on no net: GBA.2 U5.7 U5.8 U5.9 USB.4 USB.6 USB.7

## Polygon pours and split planes (outlines as drawn)
GND on Top "Top Layer-GND" (solid, remove dead copper, pour order 4): 1000,2950 1000,1000 2860,1000 2860,2950
GND on Bottom "Bottom Layer-GND" (solid, remove dead copper, pour order 6): 1000,2950 1000,1001 1001,1000 2860,1000 2860,2950

## Keep-outs
Keep-Out Layer:
  lines w10: 1000,1078.74 1000,2871 cw(c1078.74,2871) 1078.74,2949.74 ; 1000.26,1078.74 ccw(c1079,1078.74) 1079,1000 2782.25,1000 ; 1079,2950 2781.78,2950 cw(c2781.79,2871.25) 2860.53,2871.25 ; 2782.25,1000.47 ccw(c2782.25,1079.21) 2860.99,1079.21 2861,2871.25

## Silkscreen, mask and mechanical layers (free items; w line width, h text height)
Top Overlay:
  text "www.cnvintage.org" at 2821,1693 h78.74 r90
Bottom Overlay:
  text "GBxProgrammer" at 2442,2464 h150 r90
  text "Copyright Wenting Zhang 2018" at 2597,2403 h70 r90
  text "Version 1.0" at 2534,2174 h90 r90